# EAGLE board dlp.vco.dualosc.v1.1.2.main (EAGLE 7.2.0)
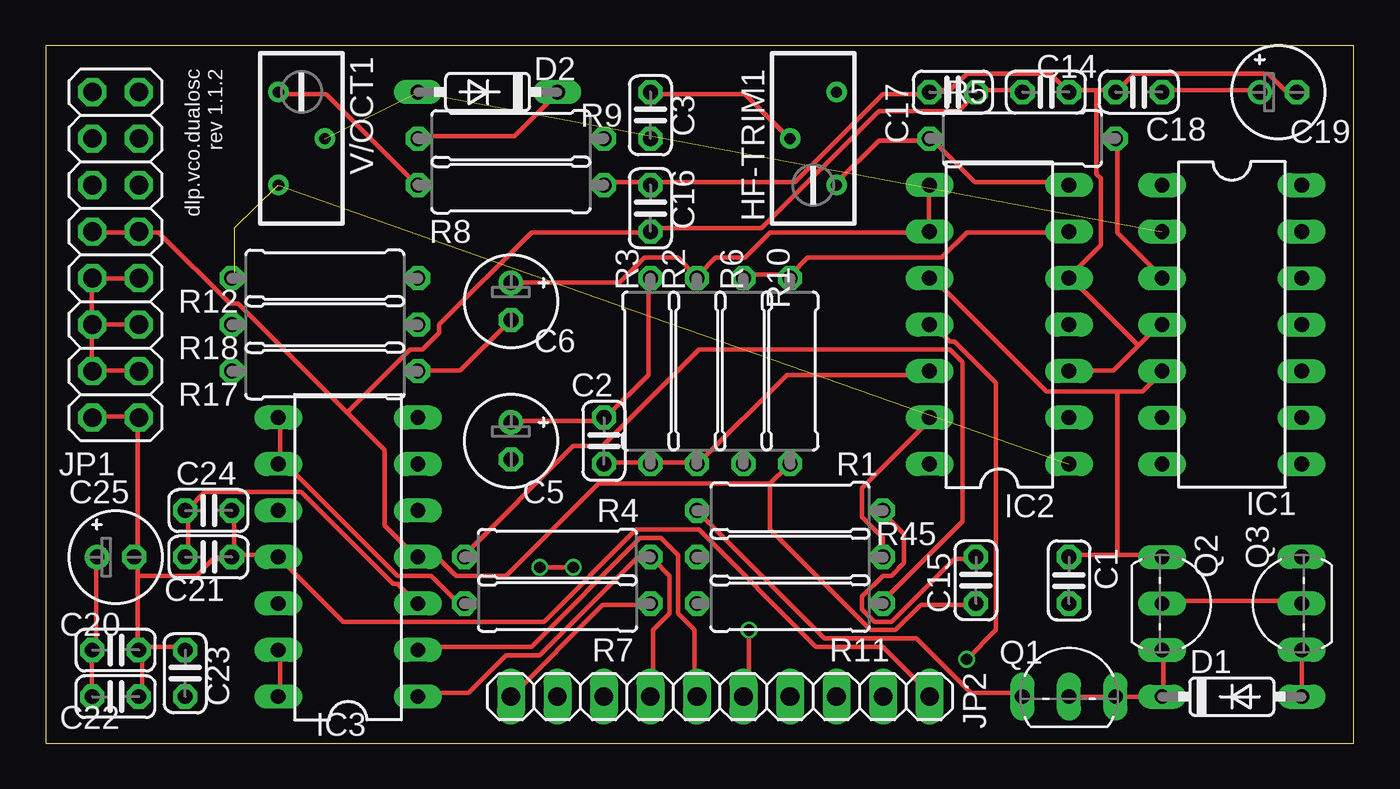
[diagram p0: board, top side]
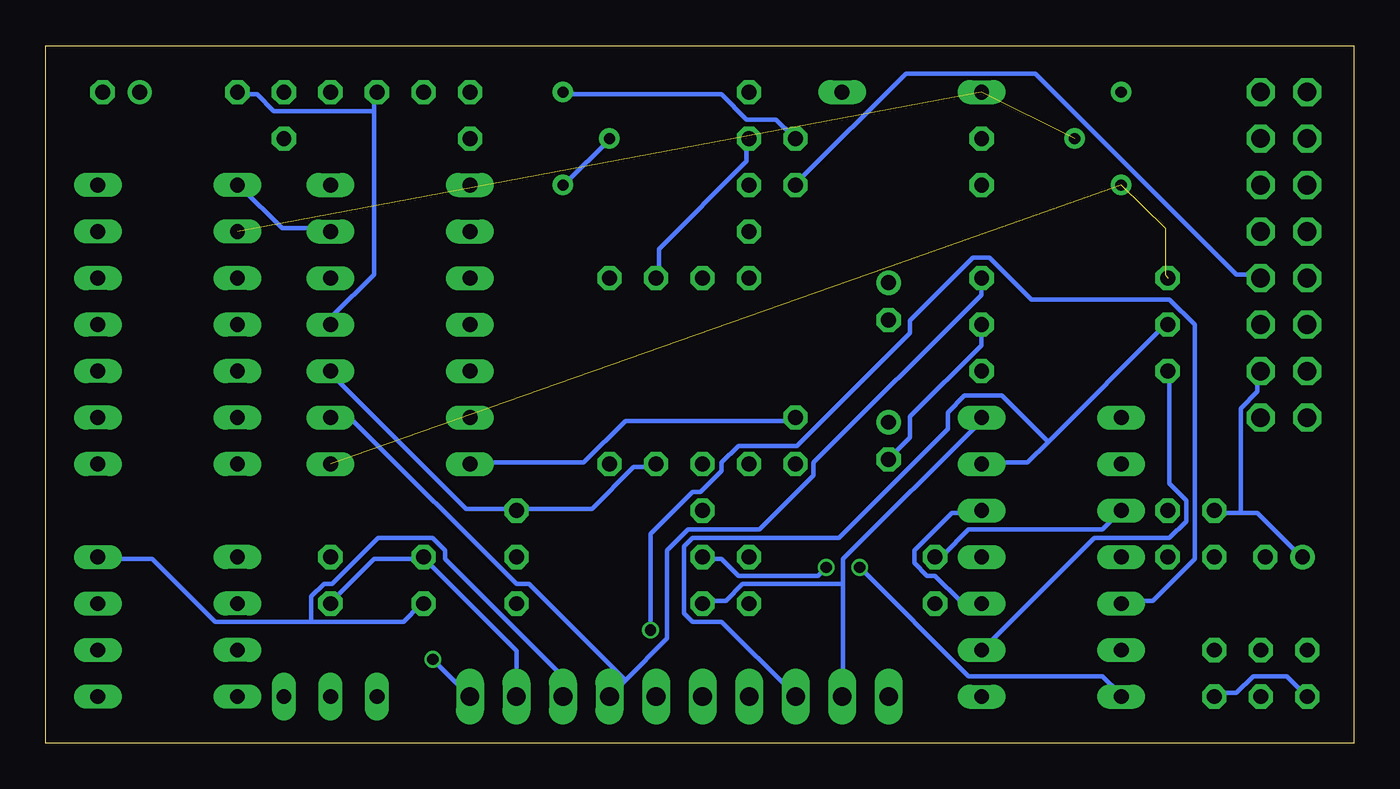
[diagram p1: board, bottom side, seen from below]

Size 71.42 x 38.09 mm. Coordinates in mm from the lower left corner, seen from the top.
Outline: 0,0 71.42,0 71.42,38.09 0,38.09 0,0
Copper layers (1*16): Top 0.035mm / dielectric 1.5mm / Bottom 0.035mm
Design rules "SeeedStudio_2layer_DRU_no_angle_20140221": minimum track width 6mil, minimum drill 12mil, track to track 6mil, track to pad 6mil, pad to pad 6mil, via to via 6mil, smd to smd 0mil, copper to edge 10mil, drill to drill 10mil, minimum pad ring 10mil, minimum via ring 6mil, stop-mask expansion 2mil, vias tented up to drill 100mil, thermal gap 10mil

## Footprints (pad centres in the part's own frame; a part is rotated, then mirrored left to right if it is on the bottom)
C025-024X044 = drill 0.813 octagon: 1 -1.27,0; 2 1.27,0
E2-5 = drill 0.813 pad 1.27: + -1.016,0 | drill 0.813 pad 1.27 octagon: - 1.016,0
DO35-7 = drill 0.813 long: A 3.81,0; C -3.81,0
RTRIM3296Y = drill 0.61: 1 1.27,-2.54; 2 -1.27,0; 3 1.27,2.54
DIL14 = drill 0.813 long: 1 -7.62,-3.81; 2 -5.08,-3.81; 3 -2.54,-3.81; 4 0,-3.81; 5 2.54,-3.81; 6 5.08,-3.81; 7 7.62,-3.81; 8 7.62,3.81; 9 5.08,3.81; 10 2.54,3.81; 11 0,3.81; 12 -2.54,3.81; 13 -5.08,3.81; 14 -7.62,3.81
2X08 = drill 1.016 octagon: 1 -8.89,-1.27; 2 -8.89,1.27; 3 -6.35,-1.27; 4 -6.35,1.27; 5 -3.81,-1.27; 6 -3.81,1.27; 7 -1.27,-1.27; 8 -1.27,1.27; 9 1.27,-1.27; 10 1.27,1.27; 11 3.81,-1.27; 12 3.81,1.27; 13 6.35,-1.27; 14 6.35,1.27; 15 8.89,-1.27; 16 8.89,1.27
1X10 = drill 1.016 long: 1 -11.43,0; 2 -8.89,0; 3 -6.35,0; 4 -3.81,0; 5 -1.27,0; 6 1.27,0; 7 3.81,0; 8 6.35,0; 9 8.89,0; 10 11.43,0
TO92 = drill 0.813 long: 1 -2.54,-1.27; 2 0,-1.27; 3 2.54,-1.27
0309/10 = drill 0.813 octagon: 1 -5.08,0; 2 5.08,0

## Placement (x,y rotation side)
C1  0.01uF  [C025-024X044]  55.88,8.89 270 top
C2  18pF  [C025-024X044]  30.48,16.51 90 top
C3  100pF  [C025-024X044]  33.02,34.29 90 top
C5  10uF  [E2-5]  25.4,16.51 270 top
C6  10uF  [E2-5]  25.4,24.13 270 top
C14  0.1uF  [C025-024X044]  54.61,35.56 0 top
C15  0.1uF  [C025-024X044]  50.8,8.89 90 top
C16  0.01uF  [C025-024X044]  33.02,29.21 90 top
C17  0.01uF  [C025-024X044]  49.53,35.56 180 top
C18  0.1uF  [C025-024X044]  59.69,35.56 180 top
C19  10uF  [E2-5]  67.31,35.56 0 top
C20  0.1uF  [C025-024X044]  3.81,5.08 0 top
C21  0.1uF  [C025-024X044]  8.89,10.16 0 top
C22  0.01uF  [C025-024X044]  3.81,2.54 0 top
C23  0.01uF  [C025-024X044]  7.62,3.81 90 top
C24  0.1uF  [C025-024X044]  8.89,12.7 0 top
C25  10uF  [E2-5]  3.81,10.16 0 top
D1  1N4148  [DO35-7]  64.77,2.54 0 top
D2  1N4148  [DO35-7]  24.13,35.56 180 top
HF-TRIM1  1M  [RTRIM3296Y]  41.91,33.02 0 top
IC1  NTE912P  [DIL14]  64.77,22.86 270 top
IC2  TL074P  [DIL14]  52.07,22.86 90 top
IC3  TL074P  [DIL14]  16.51,10.16 90 top
JP1  PWR  [2X08]  3.81,26.67 90 top
JP2  TO.PANEL  [1X10]  36.83,2.54 180 top
Q1  2N3417  [TO92]  55.88,3.81 0 top
Q2  2N3417  [TO92]  62.23,7.62 270 top
Q3  2N3906  [TO92]  67.31,7.62 90 top
R1  10K  [0309/10]  40.64,12.7 180 top
R2  100K  [0309/10]  35.56,20.32 270 top
R3  3.3M  [0309/10]  33.02,20.32 270 top
R4  10K  [0309/10]  27.94,10.16 0 top
R5  4.7K  [0309/10]  53.34,33.02 0 top
R6  100K  [0309/10]  38.1,20.32 270 top
R7  1K  [0309/10]  27.94,7.62 180 top
R8  390  [0309/10]  25.4,30.48 180 top
R9  47K  [0309/10]  25.4,33.02 180 top
R10  1.5M  [0309/10]  40.64,20.32 270 top
R11  10K  [0309/10]  40.64,7.62 180 top
R12  2.2K  [0309/10]  15.24,25.4 180 top
R17  22K  [0309/10]  15.24,20.32 180 top
R18  22K  [0309/10]  15.24,22.86 180 top
R45  10K  [0309/10]  40.64,10.16 180 top
V/OCT1  100  [RTRIM3296Y]  13.97,33.02 180 top

## Library data of the parts
C1-C3 C5 C6 C14-C25 D1 D2 IC1-IC3 Q1-Q3 R1-R12 R17 R18 R45 = _common
HF-TRIM1 V/OCT1 = rcl
JP1 JP2 = pinhead

## Nets
0V: C1.2 C14.2 C15.2 C16.2 C17.2 C18.2 C19.- C20.1 C21.1 C22.1 C23.1 C24.1 C25.+ IC1.4 IC2.3 IC2.5 IC3.3 IC3.5 JP1.3 JP1.4 JP1.5 JP1.6 JP1.7 JP1.8 JP2.2 R1.1 R6.2 R8.1
+12V: C14.1 C15.1 C16.1 C17.1 C18.1 C19.+ IC2.4 IC3.4 JP1.9 JP1.10 JP2.3 Q3.3 R10.2
-12V: C20.2 C21.2 C22.2 C23.2 C24.2 C25.- IC2.11 IC3.11 JP1.1 JP1.2 JP2.1
N$1: C1.1 IC1.5 IC2.10 Q2.1
N$2: Q2.2 Q3.2
N$3: D1.A Q3.1
N$4: C6.+ IC2.8 IC2.9 R2.1
N$5: D1.C Q1.2 Q1.3 Q2.3
N$6: Q1.1 R1.2
N$7: C2.1 IC2.12 R2.2 R3.2
N$8: IC2.13 R45.1
N$9: C2.2 C5.+ IC2.14 R3.1
N$10: D2.A IC1.2 V/OCT1.2
N$12: IC1.3 R5.2
N$13: D2.C R9.2
N$14: R8.2 V/OCT1.1
N$15: C3.1 IC1.1 IC2.6 R6.1 R10.1
N$16: IC2.1 R12.2 V/OCT1.3
N$17: HF-TRIM1.3 R9.1
N$18: IC3.10 R4.1 R11.1
N$20: IC3.8 IC3.9 R7.2
N$27: IC3.13 IC3.14 R45.2
N$29: C6.- R17.1
N$30: C5.- R18.1
N$37: C3.2 HF-TRIM1.1 HF-TRIM1.2 IC2.7 R5.1
N$EXP1: IC2.2 JP2.4 R12.1
N$OSC.OUT1: JP2.10 R7.1
N$PWM1: IC3.12 JP2.5
N$SQ.LVL1A: IC3.6 JP2.8 R18.2
N$SQ.LVL1B: IC3.7 JP2.9 R11.2
N$SW.LVL1A: IC3.2 JP2.6 R17.2
N$SW.LVL1B: IC3.1 JP2.7 R4.2

## Tracks (layer width: path | path; a pad name or v marks a point on that pad's centre or on a via)
0V
  Top 0.254: JP1.7 5.03,25.38 2.74,25.38 JP1.8 2.52,25.38 2.52,22.86 | JP1.3 5.03,20.34 2.74,20.34 JP1.4 2.52,20.34 2.52,22.86 | JP1.5 JP1.6 2.52,22.86 | C21.1 7.77,10.29 7.77,12.57 C24.1 7.77,12.8 8.69,13.72 13.95,13.72 18.97,8.69 19.2,8.69 20.12,7.77 IC3.3 | C22.1 2.52,2.74 2.52,5.03 C20.1 2.74,5.26 2.74,10.06 C25.+ | R8.1 30.63,30.63 32.92,30.63 C16.2 33.15,30.63 40.92,30.63 45.72,35.43 48.23,35.43 C17.2 48.46,35.66 49.38,35.66 50.29,36.58 54.86,36.58 C14.2 56.01,35.66 57.38,35.66 | 57.38,35.66 58.29,35.66 C18.2 59.44,36.58 66.75,36.58 67.67,35.66 68.12,35.66 C19.- | 59.66,21.72 60.81,22.86 IC1.4 | 59.66,21.72 58.29,20.34 56.01,20.34 IC2.3 | 59.66,21.72 56.01,25.38 IC2.5 56.01,25.6 57.61,27.2 57.61,30.86 57.38,31.09 57.38,35.66 | C15.2 50.75,10.06 49.61,10.06 46.18,6.63 45.26,6.63 44.58,7.32 44.58,8 45.72,9.14 46.18,9.14 46.86,9.83 46.86,11.43 45.72,12.57 R1.1
  Bottom 0.254: IC3.3 20.34,7.77 21.49,7.77 22.86,9.14 23.32,9.14 24,9.83 24,10.52 21.95,12.57 20.34,12.57 IC3.5 | C22.1 3.66,3.66 5.49,3.66 6.4,2.74 7.54,2.74 C23.1 | 6.17,12.57 5.26,12.57 2.97,10.29 C25.+ | 6.17,12.57 7.54,12.57 C24.1 | 6.17,12.57 6.17,18.29 5.26,19.2 5.26,20.12 JP1.3 | C1.2 55.78,7.77 53.49,10.06 50.98,10.06 C15.2 50.75,10.06 45.72,5.03 JP2.2 | 45.72,12.8 41.6,12.8 39.32,15.09 38.18,15.09 R6.2 | 45.72,12.8 48.46,12.8 55.78,20.12 IC2.3 | 45.72,12.8 R1.1 | JP1.7 5.26,25.6 6.4,25.6 17.37,36.58 24.46,36.58 30.4,30.63 R8.1
+12V
  Top 0.254: C18.1 61.04,35.66 66.29,35.66 C19.+ | C14.1 53.26,35.66 50.98,35.66 C17.1 50.75,35.43 49.84,34.52 45.49,34.52 39.09,28.12 33.15,28.12 C16.1 32.92,27.89 26.52,27.89 21.49,22.86 21.49,22.4 20.57,21.49 19.89,21.49 16.46,18.06 | JP1.10 2.74,27.89 5.03,27.89 JP1.9 5.26,27.89 6.17,27.89 10.06,24 10.52,24 16.46,18.06 | 39.55,14.17 30.18,14.17 25.15,9.14 22.4,9.14 21.49,10.06 20.34,10.06 IC3.4 20.12,10.29 18.52,11.89 18.52,16 16.46,18.06 | 39.55,14.17 40.46,15.09 R10.2 | 39.55,14.17 39.55,11.66 45.03,6.17 46.41,6.17 47.78,7.54 50.75,7.54 C15.1
  Bottom 0.254: 53.49,34.52 53.49,35.43 C14.1 | 53.49,34.52 53.49,25.6 55.78,23.32 55.78,22.86 IC2.4 | 53.49,34.52 58.98,34.52 59.89,35.43 60.81,35.43 C18.1 | 56.92,6.63 51.89,6.63 50.98,7.54 C15.1 | 56.92,6.63 62.18,6.63 65.61,10.06 68.58,10.06 Q3.3 | 56.92,6.63 56.92,8 56.24,8.69 55.78,8.69 53.26,11.2 50.29,11.2 49.61,10.52 49.61,10.06 43.2,3.66 43.2,2.74 JP2.3
-12V  (via drill 0.61)
  Top 0.254: v50.29,4.57 51.89,6.17 51.89,19.66 49.61,21.95 49.38,21.95 48.46,22.86 IC2.11 | 10.29,10.29 10.29,12.57 C24.2 | 10.29,10.29 12.57,10.29 IC3.11 16.23,6.63 27.2,6.63 32.23,11.66 35.66,11.66 42.06,5.26 45.72,5.26 48.23,2.74 JP2.1 | 10.29,10.29 C21.2 10.06,10.06 9.14,10.06 8.23,9.14 5.03,9.14 | JP1.2 2.74,17.83 5.03,17.83 JP1.1 5.03,17.6 5.03,10.29 C25.- 5.03,10.06 5.03,9.14 | C22.2 5.26,2.74 5.26,5.03 C20.2 | C23.2 7.54,5.26 5.26,5.26 C20.2 | 5.03,9.14 5.03,5.26 C20.2
  Bottom 0.254: JP2.1 v50.29,4.57
N$1
  Top 0.254: 58.52,10.29 60.81,10.29 Q2.1 | 58.52,10.29 56.01,10.29 C1.1 | 58.52,19.2 59.89,19.2 60.81,20.12 IC1.5 | 58.52,19.2 54.63,19.2 48.46,25.38 IC2.10 | 58.52,19.2 58.52,10.29
N$2
  Top 0.254: Q2.2 61.04,7.77 68.58,7.77 Q3.2
N$3
  Top 0.254: Q3.1 D1.A
N$4
  Top 0.254: IC2.8 48.23,30.4 48.23,28.12 IC2.9 48.23,27.89 39.55,27.89 38.18,26.52 36.58,26.52 35.66,25.6 R2.1 35.43,25.6 34.52,26.52 32.69,26.52 31.32,25.15 C6.+
N$5
  Top 0.254: Q1.2 56.01,2.52 58.29,2.52 Q1.3 58.52,2.52 60.81,2.52 D1.C 61.04,2.74 61.04,5.03 Q2.3
N$6
  Top 0.254: Q1.1 53.26,2.74 50.52,2.74 47.55,5.71 42.52,5.71 35.66,12.57 R1.2
N$7
  Top 0.254: C2.1 30.63,15.32 32.92,15.32 R3.2 33.15,15.32 35.43,15.32 R2.2 35.66,15.32 40.46,20.12 48.23,20.12 IC2.12
N$8
  Top 0.254: R45.1 45.72,11.2 44.58,12.34 44.58,13.95 48.23,17.6 IC2.13
N$9
  Top 0.254: C5.+ 25.6,17.6 30.4,17.6 C2.2 30.63,17.83 32.92,20.12 32.92,25.38 R3.1
  Bottom 0.254: IC2.14 48.23,15.32 42.06,15.32 39.78,17.6 30.63,17.6 C2.2
N$10  (2 unrouted)
N$12
  Top 0.254: R5.2 58.52,32.92 58.52,27.89 60.81,25.6 IC1.3
N$13
  Top 0.254: R9.2 20.34,33.15 25.6,33.15 27.89,35.43 D2.C
N$14
  Top 0.254: V/OCT1.1 12.8,35.43 15.32,35.43 20.12,30.63 R8.2
N$15
  Top 0.254: R6.1 38.18,25.6 40.46,25.6 R10.1 40.69,25.6 41.6,26.52 48.92,26.52 50.29,27.89 55.78,27.89 IC2.6
  Bottom 0.254: IC2.6 56.01,28.12 58.52,28.12 60.81,30.4 IC1.1 | C3.1 33.15,32.92 33.15,31.77 37.95,26.98 37.95,25.6 R6.1
N$16  (4 unrouted)
N$17
  Bottom 0.254: HF-TRIM1.3 42.98,35.43 34.52,35.43 33.15,34.06 31.55,34.06 30.63,33.15 R9.1
N$18
  Top 0.254: R11.1 45.72,7.77 50.06,12.12 50.06,20.8 49.38,21.49 35.66,21.49 30.4,16.23 28.8,16.23 22.86,10.29 R4.1
  Bottom 0.254: R4.1 22.86,10.29 22.4,10.29 21.03,11.66 13.72,11.66 12.8,12.57 IC3.10
N$20
  Top 0.254: R7.2 22.86,7.77 22.4,7.77 21.03,9.14 19.2,9.14 13.26,15.09 12.8,15.09 IC3.9 12.8,15.32 12.8,17.6 IC3.8
N$27  (via drill 0.61)
  Top 0.254: IC3.14 12.8,2.74 12.8,5.03 IC3.13 | v26.98,9.6 v28.8,9.6
  Bottom 0.254: v28.8,9.6 29.26,9.14 33.6,9.14 34.52,10.06 35.43,10.06 R45.2 | v26.98,9.6 21.03,3.66 13.72,3.66 12.8,2.74 IC3.14
N$29
  Top 0.254: C6.- 22.63,20.34 20.34,20.34 R17.1
N$30
  Bottom 0.254: R18.1 20.34,22.86 20.34,21.72 24.23,17.83 24.23,16.69 25.38,15.54 C5.-
N$37
  Top 0.254: HF-TRIM1.1 43.2,30.63 45.49,32.92 48.23,32.92 R5.1 48.46,32.92 50.75,30.63 55.78,30.63 IC2.7 | C3.2 33.15,35.43 38.18,35.43 40.46,33.15 HF-TRIM1.2
  Bottom 0.254: HF-TRIM1.1 42.98,30.63 40.69,32.92 HF-TRIM1.2
N$EXP1
  Bottom 0.254: 39.78,3.43 40.46,2.74 JP2.4 | 39.78,3.43 37.49,5.71 37.49,10.52 36.35,11.66 32.46,11.66 29.49,14.63 29.49,15.32 20.34,24.46 20.34,25.38 R12.1 | 39.78,3.43 45.03,8.69 45.72,8.69 54.63,17.6 55.78,17.6 IC2.2
N$OSC.OUT1
  Top 0.254: JP2.10 30.4,7.54 32.92,7.54 R7.1
N$PWM1  (via drill 0.61)
  Top 0.254: v38.41,6.17 38.41,2.97 38.18,2.74 JP2.5
  Bottom 0.254: v38.41,6.17 38.41,11.43 36.12,13.72 35.66,13.72 34.52,14.86 34.52,15.32 33.6,16.23 30.4,16.23 24.23,22.4 24.23,23.09 20.8,26.52 19.89,26.52 17.6,24.23 10.06,24.23 8.69,22.86 8.69,10.06 10.97,7.77 12.57,7.77 IC3.12
N$SQ.LVL1A
  Bottom 0.254: 16.69,16.46 10.29,22.86 R18.2 | 16.69,16.46 17.83,15.32 20.12,15.32 IC3.6 | 16.69,16.46 19.2,18.97 21.26,18.97 22.17,18.06 22.17,17.14 28.12,11.2 36.12,11.2 36.58,10.74 36.58,7.09 36.12,6.63 34.52,6.63 30.63,2.74 JP2.8
N$SQ.LVL1B
  Bottom 0.254: 27.89,8.69 27.89,2.74 JP2.9 | 27.89,8.69 27.89,10.06 20.34,17.6 IC3.7 | 27.89,8.69 33.38,8.69 34.29,7.77 35.43,7.77 R11.2
N$SW.LVL1A
  Top 0.254: JP2.6 35.43,2.74 35.43,6.17 34.52,7.09 34.52,10.29 33.6,11.2 32.46,11.2 26.52,5.26 20.34,5.26 IC3.2
  Bottom 0.254: R17.2 10.06,20.12 10.06,14.17 9.14,13.26 9.14,12.12 10.06,11.2 14.17,11.2 20.12,5.26 IC3.2
N$SW.LVL1B
  Top 0.254: IC3.1 20.34,2.74 23.09,2.74 25.15,4.8 26.98,4.8 32.23,10.06 32.92,10.06 R4.2 33.15,10.06 34.06,9.14 34.06,7.09 33.15,6.17 33.15,2.74 JP2.7

## Text on the board
tNames: dlp.vco.dualosc / rev 1.1.2